# Altium PCB PCB.PcbDoc
Units mil, origin at the board's own origin, x right, y up, seen from the top; angles counter-clockwise.
Board outline 1800 x 2165 mil, 2 copper layers (Top Layer, Bottom Layer); 16 components, 12 nets, 47 pads, 6 vias.
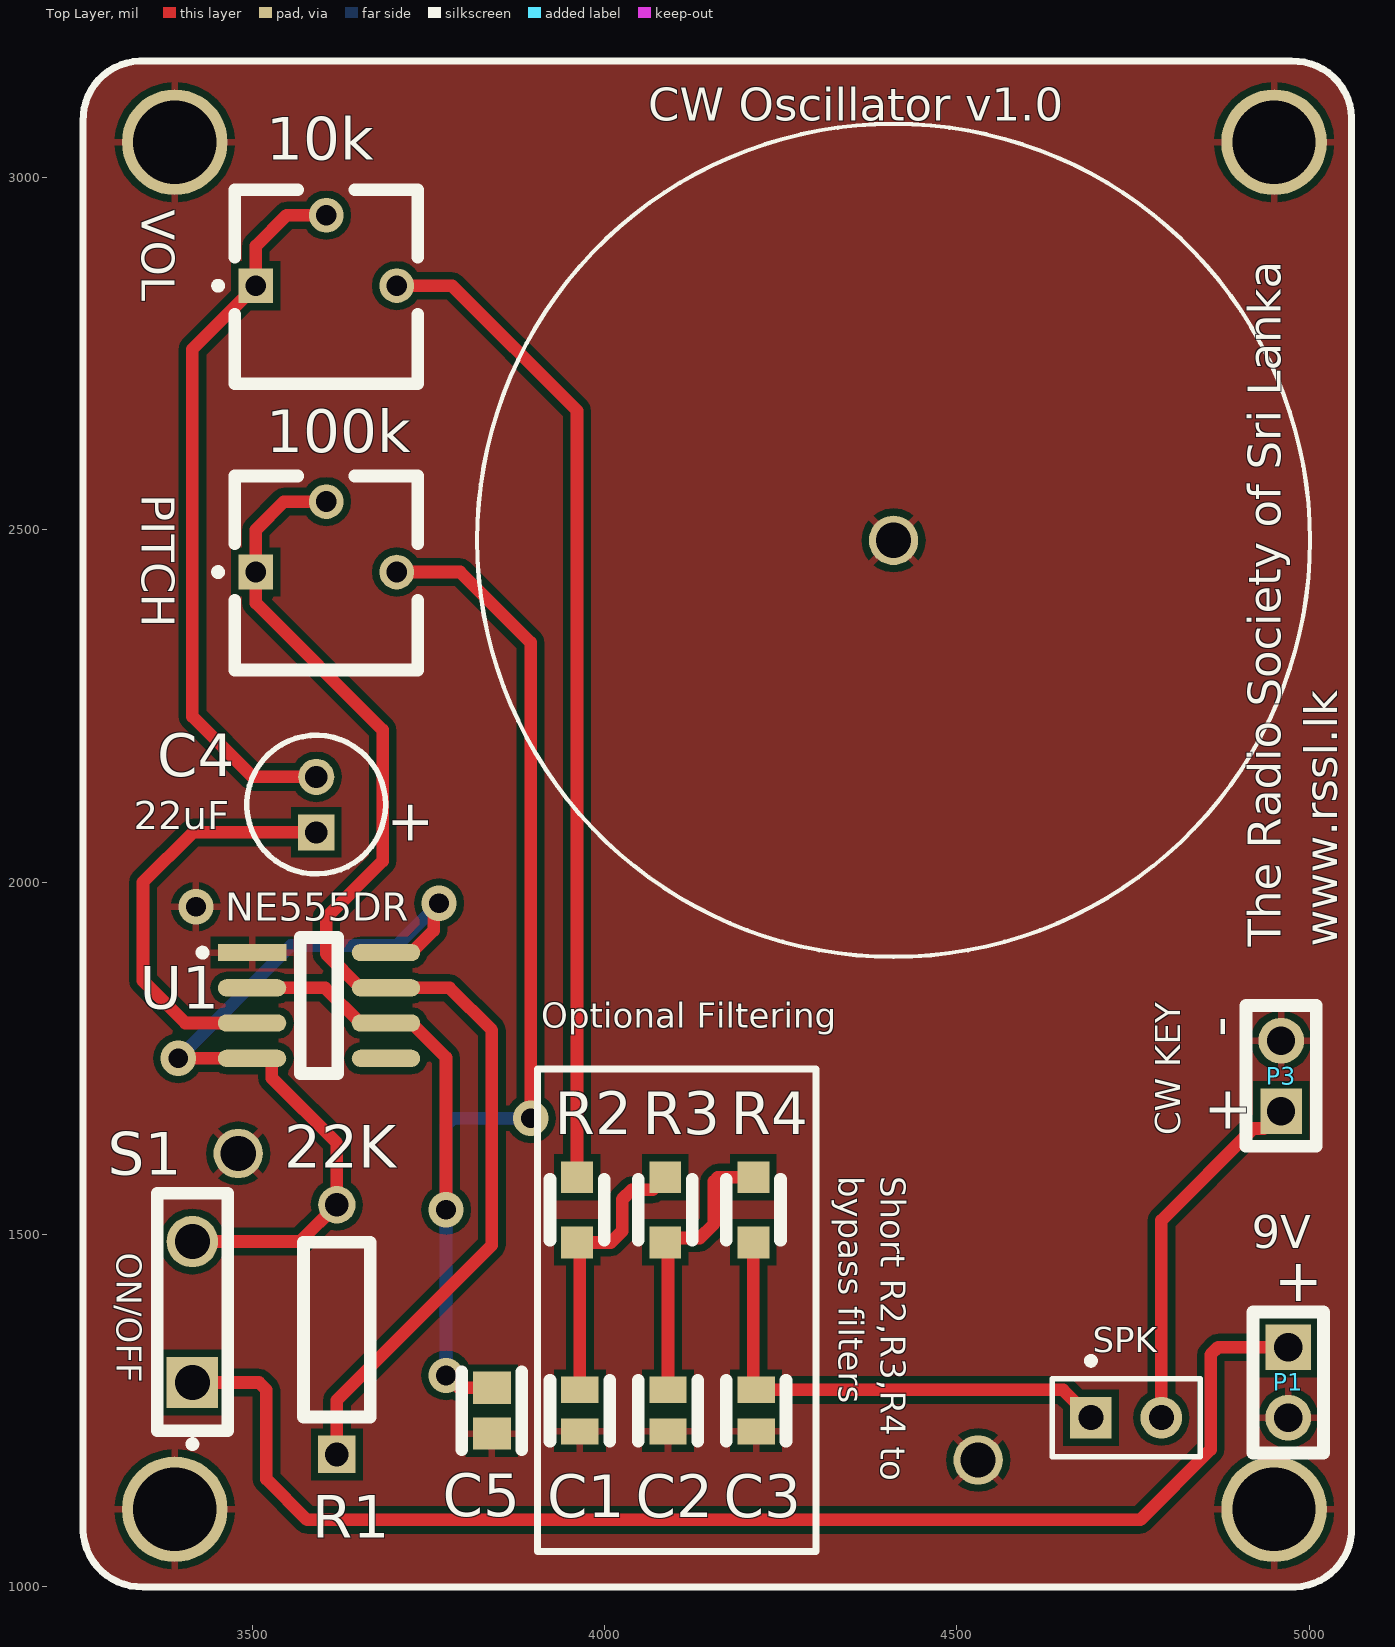
[diagram p0: Top Layer view]
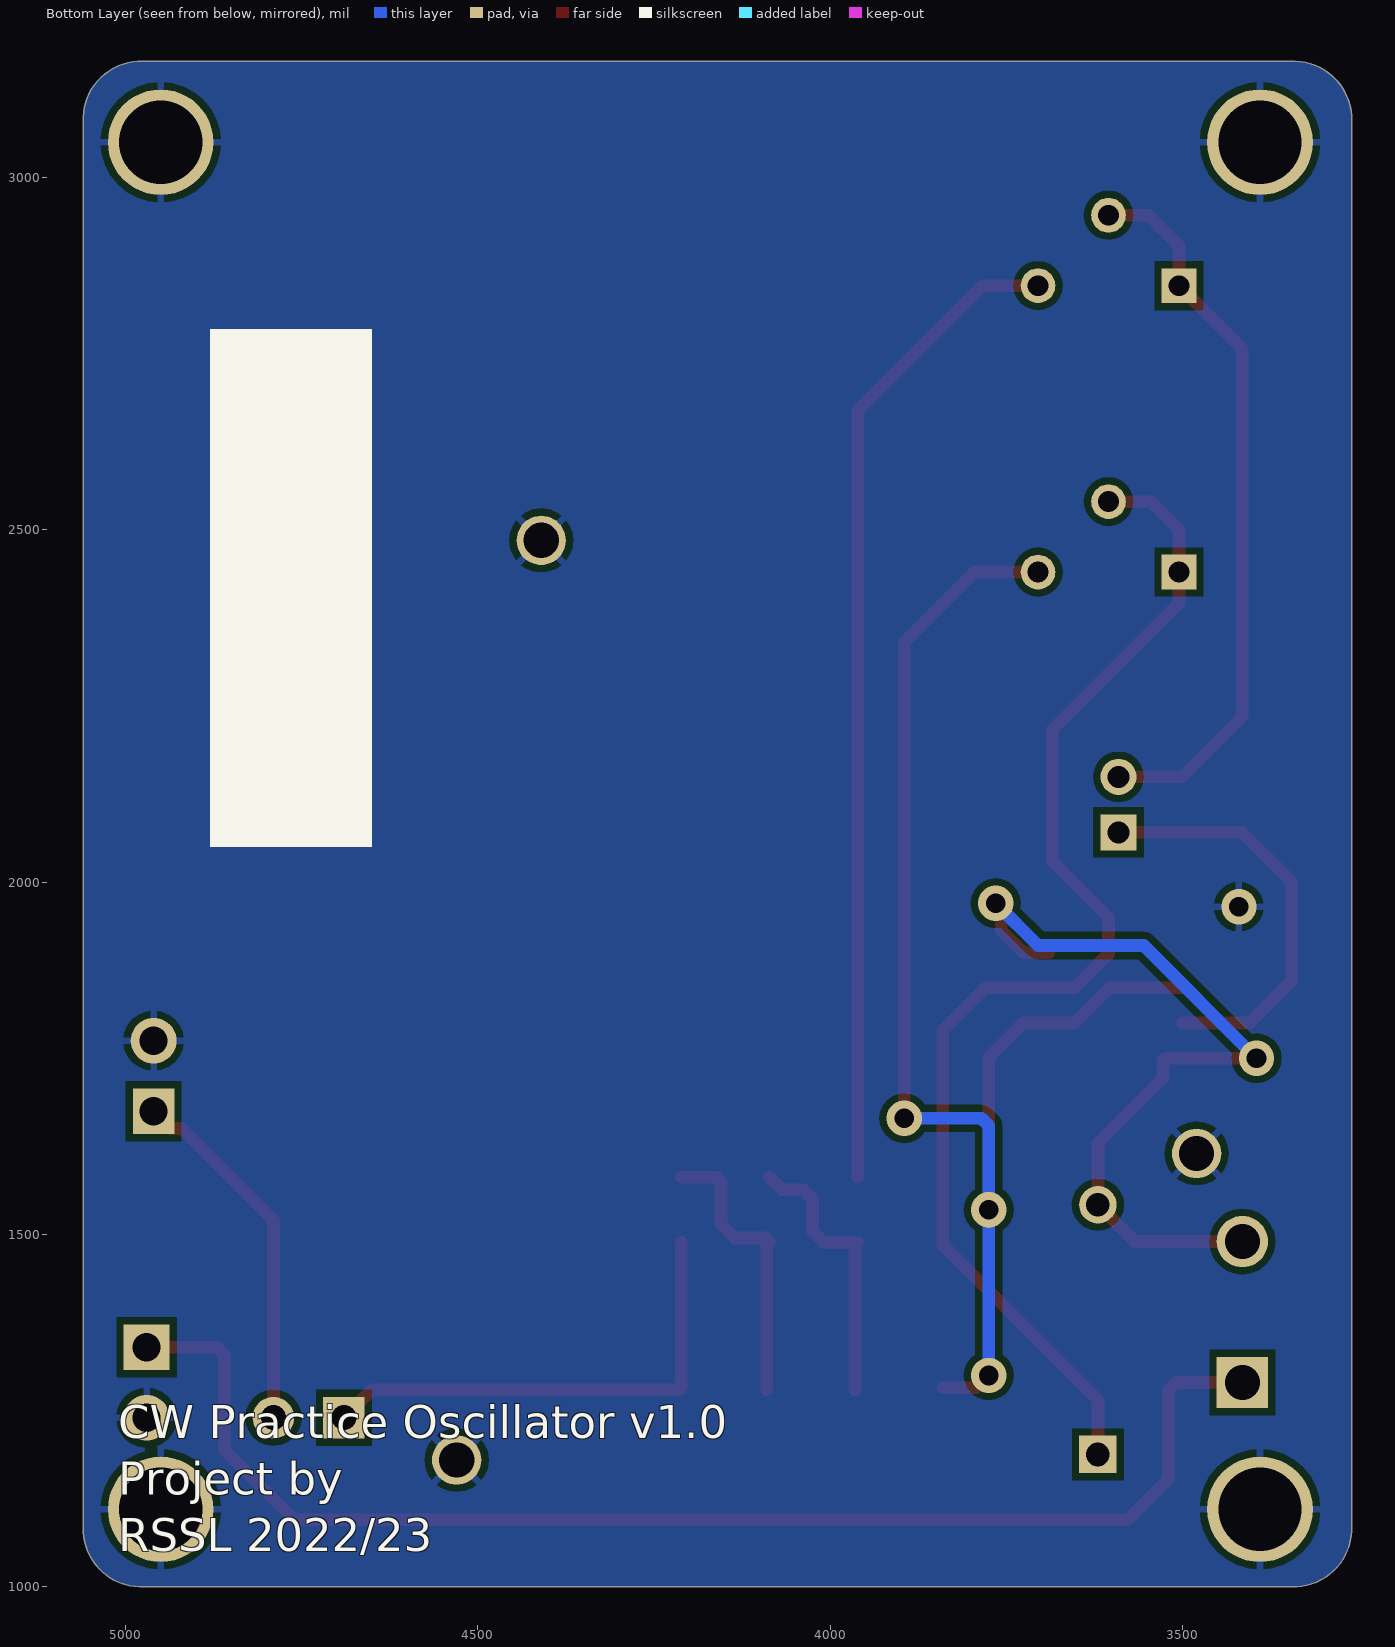
[diagram p1: Bottom Layer view, seen from below]
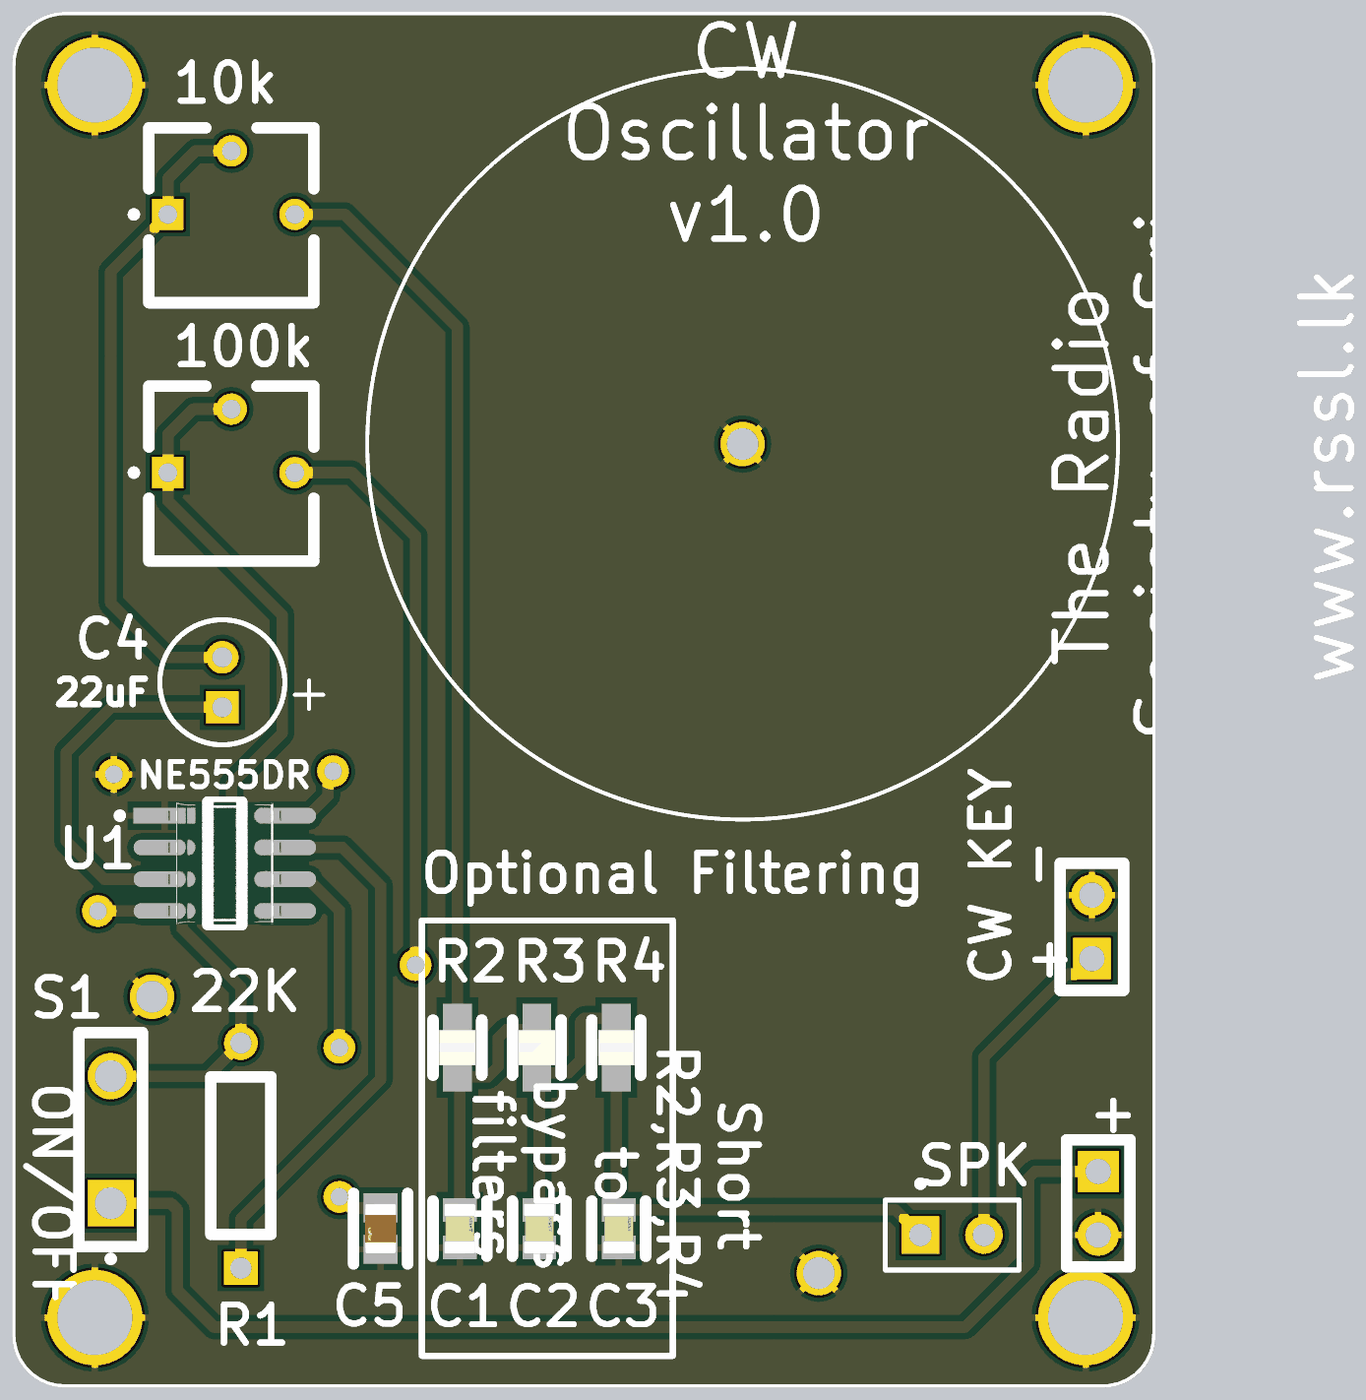
[diagram p2: 3D render of the assembled board from above, using the file's embedded part models]

## Layer stack, top to bottom
Top Solder: solder mask 0.4, Solder Resist, Dk 3.5
Top Layer: signal copper 1.4
Dielectric 1: dielectric 12.6, FR-4, Dk 4.8
Bottom Layer: signal copper 1.4
Bottom Solder: solder mask 0.4, Solder Resist, Dk 3.5

## Board outline
3260,1080 3260,3080 cw(c3342.5,3082.5) 3340,3165 4975,3165 cw(c4977.5,3082.5) 5060,3085 5060,1085 cw(c4977.5,1082.5) 4980,1000 3345,1000 cw(c3342.5,1082.5)

## Design rules (kind name [scope] priority, off if disabled: settings)
Clearance [All] p1: gap=10 ignorepadtopadclearanceinfootprint=FALSE except(0: Arc-Hole Track-Hole SMDPad-Hole THPad-Hole Via-Hole Fill-Hole Poly-Hole Region-Hole Text-Hole)
MinimumSolderMaskSliver [All] p1 off: minsoldermaskwidth=10
PolygonConnect [All] p1: connectstyle=Relief reliefconductorwidth=10 reliefentries=4 polygonreliefangle="90 Angle" airgapwidth=10
RoomDefinition CW-Oscillator [InComponentClass('CW-Oscillator')] p1: confinementstyle=ConfineIn formatcopy=TRUE lockcomponents=FALSE outline 3260,1005 5060,1005 5060,3160 3260,3160
RoutingVias [All] p1: holewidth=28 width=50 viastyle="Through Hole" minholewidth=28 minwidth=50 maxholewidth=28 maxwidth=50
SilkToSilkClearance [All] p1 off: silktosilkclearance=1
SilkToSolderMaskClearance [IsPad] p1 off: minsilkscreentomaskgap=2 clearancetoexposedcopper=TRUE
SolderMaskExpansion [All] p1: expansion=4 istentingtop=FALSE
Width [All] p1: maxlimit=20 minlimit=10 preferedwidth=18
27 further rules are at their usual default settings.

## Components (designator, comment, footprint, x,y, rotation, side; value= is the part's Value field where it differs from the comment)
10k "VOL" BOUR-3362P 3605,2845 r0 top (schematic designator VR1)
100k "PITCH" BOUR-3362P 3605,2438.62 r0 top (schematic designator VR2)
C1 "0.10 μF" FP-C0805C-DN-MFG 3964.84,1250 r270 top
C2 "0.10 μF" FP-C0805C-DN-MFG 4089.92,1250 r270 top
C3 "0.10 μF" FP-C0805C-DN-MFG 4215,1250 r270 top
C4 "22uF" CAPPR55-200-1100X500X1200 3590.73,2110 r90 top
C5 "20nF" FP-GRM21B-0_1-IPC_B 3840,1250 r270 top
P1 "9V" HDR1X2#1 4970,1340 r270 top
P3 "CW KEY" HDR1X2#2 4960,1675 r90 top
R1 "22K" RESA60-630X240 3620,1365 r90 top
R2 "1.5kR" FP-ERJ6EN-MFG 3960.9,1535 r270 top
R3 "1.5kR" FP-ERJ6EN-MFG 4085.98,1535 r270 top
R4 "1.5kR" FP-ERJ6EN-MFG 4211.06,1535 r270 top
S1 "ON/OFF" SPST-2 3415,1390 r90 top
SPK "Speaker" PIN2 4690,1240 r0 top (schematic designator LS1)
U1 "NE555DR" FP-D0008A-IPC_A 3594.67,1825 r0 top

## Footprints (in the part's own frame and the unit in brackets; to place one, negate y for a bottom-side part, rotate by r counter-clockwise, add the part's x,y. Pads: shape width x height; smd on the part's side, far side on the other; paste and mask are expansions set on the pad)
BOUR-3362P [mm] "THD, 3-Leads, Body 6.6x6.99mm, Pitch 2.54mm"
  rect 1.25x1.25 hole 0.75: 1(-2.54,0.035)
  round 1.25 hole 0.75: 2(0,2.575) 3(2.54,0.035)
  silkscreen extent -4.02,-3.49 3.3,3.5, body extent -3.3,-3.49 3.3,3.49, height 4.95
CAPPR55-200-1100X500X1200 [mm] "THD, 2-Leads, Dia 5mm, Body Length 11mm"
  rect 1.3x1.3 hole 0.8: 1(-1,0)
  round 1.3 hole 0.8: 2(1,0)
  silkscreen extent -2.5,-2.5 2.5,2.5, body extent -2.5,-2.5 2.5,2.5, height 12
FP-C0805C-DN-MFG [mm]
  rect 0.95x1.35 smd paste+0 mask+0: 1(-0.75,0) 2(0.75,0)
  silkscreen extent -1.1,-1.07 1.1,1.07, body extent -1.4,-0.85 1.4,0.85, height 0.25
FP-D0008A-IPC_A [mil]
  rect 97.21x24.49 smd paste+0 mask+0: 1(-95.02,75)
  rrect100% 97.21x24.49 smd paste+0 mask+0: 2(-95.02,25) 3(-95.02,-25) 4(-95.02,-75) 5(95.02,-75) 6(95.02,-25) 7(95.02,25) 8(95.02,75)
  silkscreen extent -170,-97 27,97, body extent -163,-116 163,116, height 10
FP-ERJ6EN-MFG [mm]
  rect 1.15x1.15 smd paste+0 mask+0: 1(-1.175,0) 2(1.175,0)
  silkscreen extent -1.1,-0.97 1.1,0.97, body extent -1.85,-0.77 1.85,0.77, height 0.25
FP-GRM21B-0_1-IPC_B [mil]
  rect 45.58x53.63 smd paste+0 mask+0: 1(-32.57,0) 2(32.57,0)
  silkscreen extent -55,-43 55,43, body extent -65,-37 65,37, height 10
HDR1X2#1 [mil] "Connector; Header; 2 Position"
  rect 65x65 hole 40: 1(0,0)
  round 65 hole 40: 2(100,0)
  silkscreen extent -50,-50 150,50
HDR1X2#2 [mil] "Connector; Header; 2 Position"
  rect 65x59.06 hole 40: 1(0,0)
  round 65 hole 40: 2(100,0)
  silkscreen extent -50,-50 150,50
PIN2 [mm] "Photosensitive Diode; 2 Leads"
  rect 1.5x1.5 hole 0.9: 1(0,0)
  round 1.5 hole 0.9: 2(2.54,0)
  silkscreen extent -1.4,-1.4 3.94,2.17
RESA60-630X240 [mm] "Axial Resistor, 2-Leads, Dia 2.4mm, Body Length 6.3mm"
  rect 1.35x1.35 hole 0.85: 1(-4.5,0)
  round 1.35 hole 0.85: 2(4.5,0)
  silkscreen extent -3.15,-1.2 3.15,1.2, body extent -3.15,-1.2 3.15,1.2, height 2.4
SPST-2 [mm] "Switch; 2 Leads"
  rect 1.85x1.85 hole 1.27: 1(-2.54,0)
  round 1.85 hole 1.27: 2(2.54,0)
  silkscreen extent -4.89,-1.27 4.28,1.27

## Part data
10k: library part CMP-1747-00004-1, "Square Trimpot(R) Trimming Potentiometer, 10 KOhm, 300 V, -55 to 125 degC, 3-Pin THD, RoHS, Tube", Case Code (Imperial)=0612, Case Code (Metric)=1632, Case/Package=1206, Max Operating Temperature=125degC, Min Operating Temperature=-25degC, Package Quantity=5000, Power Rating="1 W", Resistance=10k, Tolerance=1%, Voltage Rating="220 mV", ComponentLink1Description="Manufacturer URL", ComponentLink1URL=http://www.bourns.com/, ComponentLink2Description=Datasheet, ComponentLink2URL=http://www.bourns.com/docs/Product-Datasheets/3362.pdf, DatasheetVersion=May-16, Height="0.6 mm", Length="3.2 mm", Mount="Surface Mount", PackageDescription="3-Pin Through Hole Device, Body 6.6 x 6.99 mm, Pitch 2.54 mm", PackageReference=3326P, Packaging="Tape and Reel", Pins=2, REACH SVHC="No SVHC", RoHSCompliant=True, Width="1.6 mm"
100k: library part CMP-1747-00003-1, "Square Trimpot(R) Trimming Potentiometer, 100 KOhm, 300 V, -55 to 125 degC, 3-Pin THD, RoHS, Tube", Case\Package=Axial, Max Operating Temperature="155 degC", Min Operating Temperature="-55 degC", Package Quantity=200, Power Rating="250 mW", Resistance=100K, Tolerance=1%, Voltage Rating="250 V", ComponentLink1Description="Manufacturer URL", ComponentLink1URL=http://www.bourns.com/, ComponentLink2Description=Datasheet, ComponentLink2URL=http://www.bourns.com/docs/Product-Datasheets/3362.pdf, DatasheetVersion=May-16, Length="0.248 inch", Mount="Through Hole", PackageDescription="3-Pin Through Hole Device, Body 6.6 x 6.99 mm, Pitch 2.54 mm", PackageReference=3326P, Packaging=Bulk, RoHSCompliant=true
C1 C2 C3: library part CMP-2007-00279-2, "CAP CER 0.1UF 50V X7R 0805", Manufacturer=KEMET, Manufacturer Part Number=C0805C104K5RACTU, Package=C0805C-DN, Temperature="-55°C to +125°C", Temperature Characteristic=X7R, Temperature Coefficient=30ppm/°C, Temperature Range High=+125°C, Temperature Range Low=-55°C, Tolerance=0.1, Voltage Rating="50 V", Automotive=No, Capacitance="0.10 μF", Category=Cap, ComponentLink2Description=Datasheet, ComponentLink2URL=https://content.kemet.com/datasheets/KEM_C1003_C0G_SMD.pdf, Device Class L1="Passive Components", Device Class L2=Capacitors, Device Class L3="Ceramic Capacitors", Digikey Description="CAP CER 0.1UF 50V X7R 0805", Height=0.88mm, Ipc Land Pattern Name=CAPC200125X78, Lead Free=Yes, Material=Ceramic, Mouser Description="Cap Ceramic 0.1uF 50V X7R 10% SMD 2.0 x 1.2 mm 125 C Paper T/R", Octopart=https://octopart.com/c0805c104k5ractu-kemet-143926, RoHS=TRUE
C4: library part CMP-1665-00036-2, "Aluminum Electrolytic Capacitor, 22 uF, +/- 20%, 50 V, -40 to 85 degC, 2-Pin THD, RoHS, Bulk", Case/Package=Radial, Leakage Current=3uA, Manufacturer=Panasonic, Max Operating Temperature=85degC, Min Operating Temperature=-40degC, Package Description="2-Pin Radial Lead, Dia 5 mm, Height 12 mm", Package Quantity=200, Package Reference=CAPPR55-200-1100X500X1200, Ripple Current=100mA, Tolerance=20%, Voltage=50V, Capacitance=22uF, Datasheet URL=https://industrial.panasonic.com/cdbs/www-data/pdf/RDF0000/ABA0000C1218.pdf, Datasheet Version="Rev. 05, 10/2016", Diameter=5mm, Dissipation Factor=0.12%, Height=11mm, Height - Seated (Max)=0.472inch, Lead Diameter=0.5mm, Lead Pitch=2mm, Lead/Base Style=Straight, Length=11mm, Life (Hours)=2000Hour, Manufacturer URL=http://www.panasonic.com/, Mount=ThroughHole, Packaging=Bulk, Radiation Hardening=No, REACH SVHC=NoSVHC, Ripple Current (AC)=100mA, RoHSCompliant=true, Termination=Radial, Voltage Rating=50V, Voltage Rating (DC)=50V
C5: library part CMP-2007-03469-2, "Chip Multilayer Ceramic Capacitors for General Purpose, 0805, 20000pF, C0G, 30ppm/°C, 5%, 50V", Case Code (Imperial)=0805, Case Code (Metric)=2012, Dielectric=C0G, Max Operating Temperature=125°C, Min Operating Temperature=-55°C, Package Quantity=3000, Tolerance=5%, Voltage Rating=50V, Capacitance=20nF, Case/Package=0805, Depth=1.25mm, Height=1.25mm, Lead Free="Lead Free", Length=2mm, Mount="Surface Mount", Packaging="Tape and Reel", Radiation Hardening=No, Termination=SMD/SMT, Thickness=0.053inch, Voltage Rating (DC)=50V, Width=0.049inch
P1 P3: library part "Header 2", "Header, 2-Pin", LatestRevisionDate=17-Jul-2002, LatestRevisionNote="Re-released for DXP Platform.", Publisher="Altium Limited"
R1: library part CMP-1659-00062-1, "Axial Resistor, 22.1 KOhm, +/- 1%, 0.25 W, -55 to 155 degC, 2-Pin THD, RoHS, Bulk", Case Code (Metric)=2520, Case\Package=1008, Current Rating="1.5 A", Max Operating Temperature="85 degC", Min Operating Temperature="-40 degC", Package Quantity=3000, Tolerance=20%, ComponentLink1Description="Manufacturer URL", ComponentLink1URL=http://www.yageo.com/, ComponentLink2Description=Datasheet, ComponentLink2URL=http://www.yageo.com/documents/recent/Yageo%20LR_MFR_2013.pdf, DatasheetVersion=Apr-13, Height="1.1 mm", Length="2.5 mm", Mount="Surface Mount", PackageDescription="2-Pin Axial Lead, Dia 2.4 mm, Body Length 6.3 mm", PackageReference=MFR-25, Packaging="Tape and Reel", Radiation Hardening=No, Resistance=22K, RoHSCompliant=true, Shielding=Shielded, Width="2 mm"
R2 R3 R4: library part CMP-2001-04438-5, "RES SMD 1.5K OHM 1% 1/8W 0805", Case Code (Imperial)=0805, Case Code (Metric)=2012, Max Operating Temperature=155°C, Max Power Dissipation=125mW, Min Operating Temperature=-55°C, Package Quantity=1, Resistance Tolerance=1%, Resistor Type="Thick Film", Temperature Coefficient=100ppm/°C, Voltage Rating=150V, Case/Package=0805, Construction=Rectangular, Contact Plating=Tin, Depth=1.25mm, Features="Automotive AEC-Q200", Height=0.6mm, Lead Free="Lead Free", Length=2mm, Military Standard=Not, Mount="Surface Mount", Number of Pins=2, Number of Terminations=2, Packaging="Tape and Reel", Power Rating=125mW, Radiation Hardening=No, Reach SVHC Compliant=Yes, Resistance=1.5kR, RoHS Compliant=Yes, Series=ERJ, Size Code=0805, Technology="THICK FILM", Termination=SMD/SMT, Tolerance=1%, Voltage Rating (DC)=150V, Width=1.2mm
S1: library part SW-SPST, "Single-Pole, Single-Throw Switch", LatestRevisionDate=17-Jul-2002, LatestRevisionNote="Re-released for DXP Platform.", PackageDescription="Switch; 2 Leads", PackageReference=SPST-2, Published=24-Mar-1999, Publisher="Altium Limited"
SPK: "Loudspeaker", LatestRevisionDate=17-Jul-2002, LatestRevisionNote="Re-released for DXP Platform.", PackageReference=PIN2, Published=24-Mar-1999, Publisher="Altium Limited"
U1: library part CMP-1685-00007-2, "IC OSC SGL TIMER 100KHZ 8-SOIC", Case/Package=SOIC, Frequency=100kHz, High Level Output Current=-200mA, Low Level Output Current=200mA, Max Operating Temperature=70°C, Max Supply Voltage=16V, Min Operating Temperature=0°C, Min Supply Voltage=4.5V, Operating Supply Current=10mA, Package Quantity=2500, Quiescent Current=15mA, Contact Plating=Gold, Height=1.58mm, Lead Free="Lead Free", Length=4.9mm, Mount="Surface Mount", Number of Pins=8, Number of Timers/Counters=1, Packaging="Tape and Reel", Radiation Hardening=No, REACH SVHC="No SVHC", Weight=0.002561oz, Width=3.91mm

## Free pads (board coordinates)
  round 70 hole 50: 15(3480,1615) 15(4410,2485) 15(4530,1180)
  round 150 hole 118.11: 96(3390,1110) 96(3390,3050) 96(4950,1110) 96(4950,3050)

## Via types
v1: diameter 50, hole 28, Top Layer to Bottom Layer, 6 vias

## Nets (pads, with @x,y where several pads share a name; then routed paths per layer and width w, separated by ;. In a path a pad name is that pad's centre, name@x,y a point inside that pad or via, vN(x,y) a via of type N, cw(c..) or ccw(c..) an arc to the next point about the centre after c; other vN are vias at no path point)
GND: C1.2 C2.2 C3.2 C5.2 P1.2 P3.2 pad.15 pad.96 U1.1
  other v1: 3420,1965
NetC1_1: C1.1 R2.2 R3.1 | length 400.6
  Top Layer w18: C1.1 3964.84,1484.8 R2.2 4008.74,1488.74 4025,1505 4025,1550 4038.62,1563.62 4068.35,1563.62 R3.1
NetC2_1: C2.1 R3.2 R4.1 | length 409.6
  Top Layer w18: C2.1 4089.92,1484.8 R3.2 4092.24,1495 4135,1495 4155,1515 4155,1575.4 4160.86,1581.26 R4.1
NetC3_1: C3.1 R4.2 SPK.1 | length 702.2
  Top Layer w18: R4.2 4211.06,1283.46 C3.1 4650.47,1279.53 SPK.1
NetC4_1: C4.1 U1.3 | length 594.5
  Top Layer w18: U1.3 3405,1800 3345,1860 3345,2000 3415.63,2070.63 C4.1
NetC4_2: 10k.1 10k.2 C4.2 | length 1034.2
  Top Layer w18: C4.2 3500.63,2149.37 3415,2235 3415,2756.38 10k.1 3505,2902.6 3548.77,2946.38 10k.2
NetC5_1: 100k.3 C5.1 U1.2 U1.6 | length 2004
  Top Layer w18: U1.2 3603.33,1850 3653.33,1800 U1.6 3726.05,1800 3775,1751.05 v1(3775,1535) ; 100k.3 3795,2440 3895,2340 v1(3895,1665) ; v1@3765,1300 3775.82,1300 3793.26,1282.57 C5.1
  Bottom Layer w18: v1@3765,1300 3765,1310 3775,1320 3775,1654.46 3785.54,1665 v1(3895,1665)
  other v1: 3775,1300
NetLS1_2: P3.1 SPK.2 | length 514.2
  Top Layer w18: SPK.2 4790,1520 4920.47,1650.47 4935.47,1650.47 P3.1
NetP1_1: P1.1 S1.1 | length 1890.2
  Top Layer w18: S1.1 3509.46,1290 3520,1279.46 3520,1152.8 3577.8,1095 4760,1095 4860,1195 4860,1329.46 4870.54,1340 P1.1
NetR1_1: 100k.1 100k.2 R1.1 U1.7 | length 1799.1
  Top Layer w18: 100k.2 3545,2540 3505,2500 100k.1 3505,2395.86 3685,2215.86 3685,2030 3605,1950 3605,1898.33 3653.33,1850 U1.7 3780,1850 3840,1790 3840,1485 3620,1265 R1.1
NetR1_2: R1.2 S1.2 U1.4 U1.8 | length 1187.2
  Top Layer w18: v1(3395,1750) 3524.57,1750 3527.57,1747 3527.57,1722.07 3620,1629.64 R1.2 3567.83,1490 S1.2 ; U1.8 3726.05,1900 3757.35,1931.3 3757.35,1962.35 v1(3765,1970)
  Bottom Layer w18: v1(3395,1750) 3555,1910 3705,1910 v1(3765,1970)
NetR2_1: 10k.3 R2.1 | length 1417.2
  Top Layer w18: 10k.3 3783.62,2846.38 3960.9,2669.1 R2.1
pads on no net: U1.5

## Polygon pours and split planes (outlines as drawn)
GND on Bottom Layer "BOT GND" (solid, remove dead copper, pour order 2): 3260,1080 3260,3080 cw(c3342.5,3082.5) 3340,3165 4975,3165 cw(c4977.5,3082.5) 5060,3085 5060,1085 cw(c4977.5,1082.5) 4980,1000 3345,1000 cw(c3342.5,1082.5)
GND on Top Layer "TOP GND" (solid, remove dead copper, pour order 3): 3260,1080 3260,3080 cw(c3342.5,3082.5) 3340,3165 4975,3165 cw(c4977.5,3082.5) 5060,3085 5060,1085 cw(c4977.5,1082.5) 4980,1000 3345,1000 cw(c3342.5,1082.5)

## Silkscreen, mask and mechanical layers (free items; w line width, h text height)
Top Overlay:
  circle w6: c4410,2485 r591
  lines w10: 3260,1080 ccw(c3342.5,1082.5) 3345,1000 4980,1000 ccw(c4977.5,1082.5) 5060,1085 5060,3085 ccw(c4977.5,3082.5) 4975,3165 3340,3165 ccw(c3342.5,3082.5) 3260,3080 3260,1080 ; 3905,1050 3905,1735 4300,1735 4300,1050 3905,1050
  text "CW Oscillator v1.0" at 4061.8,3065 h80
  text "The Radio Society of Sri Lanka / www.rssl.lk" at 5055,1908.46 h80 r90
  text "Optional Filtering" at 3910.31,1781.11 h60
  text "-" at 4899.99,1780 h60 r90
  text "+" at 4850,1650 h60
  text "Short R2,R3,R4 to / bypass filters" at 4320,1582.5 h60 r270
  text "+" at 4950,1405 h60
Bottom Overlay:
  region: 4880,2050 4880,2785 4650,2785 4650,2050
  text "CW Practice Oscillator v1.0  / Project by  / RSSL 2022/23" at 5010,1035 h80

## Text inside footprints (layer, text, board x,y; h text height)
C4: Top Overlay "+" at 3750,2050 h59.06 r90